# EAGLE board alim_v1 (EAGLE 4.16)

Size 160 x 100 mm. Coordinates in mm from the lower left corner, seen from the top.
Outline: 0,0 160,0 160,100 0,100 0,0
Copper layers (1*16): Top 0.035mm / dielectric 1.5mm / Bottom 0.035mm
Design rules "default": minimum track width 10mil, minimum drill 24mil, track to track 8mil, track to pad 8mil, pad to pad 8mil, via to via 8mil, smd to smd 8mil, copper to edge 40mil, drill to drill 8mil, minimum pad ring 10mil, minimum via ring 8mil, stop-mask expansion 4mil, vias tented up to drill 0mil, thermal gap 10mil

## Footprints (pad centres in the part's own frame; a part is rotated, then mirrored left to right if it is on the bottom)
E2,5-6 = drill 0.813 pad 1.6 round: + -1.27,0 | drill 0.813 pad 1.6 octagon: - 1.27,0
DO41-10 = drill 1.118 round: A 5.08,0; C -5.08,0
DD-3 = smd 1.27 x 5.08: 1 -2.54,-7.938; 2 0,-7.938; 3 2.54,-7.938
TJ3-U1 = drill 0.9 round: 1 -3.3,0; 2 3.3,0
MSTBV2 = drill 1.397 long: 1 -2.5,0; 2 2.5,0

## Placement (x,y rotation side)
C1  [E2,5-6]  -22.23,42.38 0 top  (outside the outline)
C2  [E2,5-6]  -37.47,42.38 0 top  (outside the outline)
D1  1N4004  [DO41-10]  -41.28,24.6 0 top  (outside the outline)
IC1  REG1117F  [DD-3]  -20.96,14.44 0 top  (outside the outline)
L1  [TJ3-U1]  -22.23,29.68 0 top  (outside the outline)
X1  [MSTBV2]  -36.2,6.82 0 top  (outside the outline)
X2  [MSTBV2]  -50.17,6.82 0 top  (outside the outline)

## Library data of the parts
C1 C2 L1 = rcl
D1 = diode
IC1 = burr-brown
X1 X2 = con-phoenix-500

## Nets
GND: C1.- C2.- IC1.1 X1.2 X2.1
N$1: D1.A X1.1
N$2: C1.+ D1.C IC1.3
N$3: C2.+ IC1.2 L1.1
N$4: L1.2 X2.2

## Tracks (layer width: path | path; a pad name or v marks a point on that pad's centre or on a via)
GND  (4 unrouted)
N$1  (1 unrouted)
N$2  (2 unrouted)
N$3  (2 unrouted)
N$4  (1 unrouted)